# Allegro board hvps-1.brd
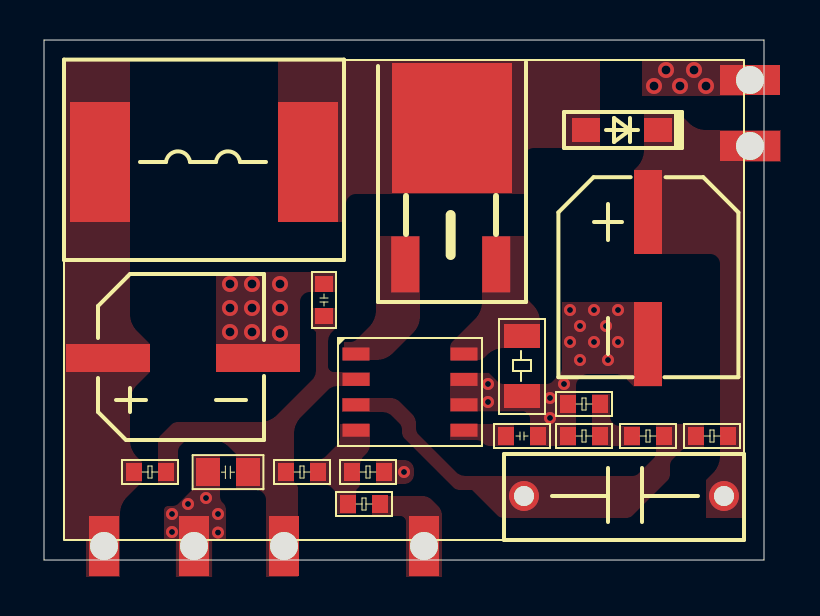
[diagram p0: board, top side]
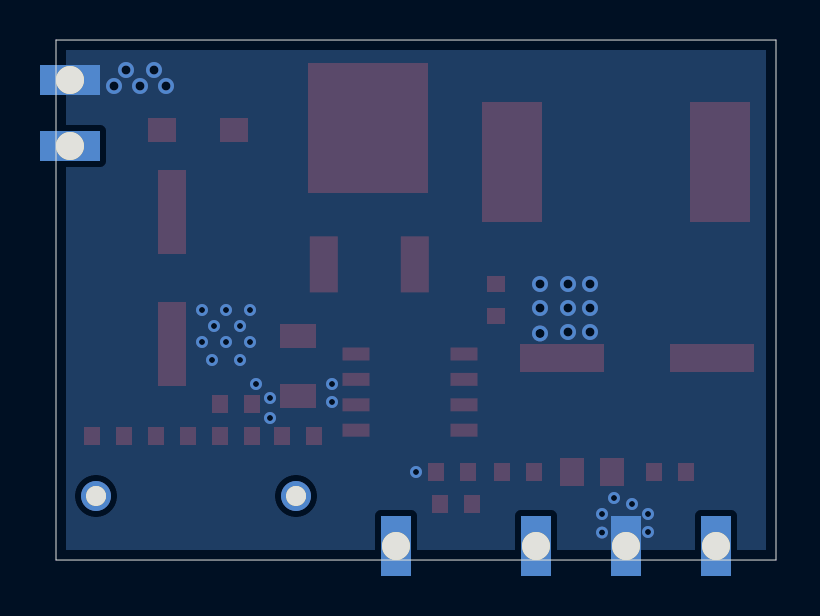
[diagram p1: board, bottom side, seen from below]

Outline 36 x 26 mm; copper layers: TOP, BOTTOM. Coordinates in mm from the lower left corner of the outline.
Outline path: 0,26 0,0 36,0 36,26 0,26

## Design rules (mm)
constraint set DEFAULT: min track width 0.254

## Placement (name value [footprint] x y rotation side)
C1  4.7uF/400V  [CAP-SMD-D8D0-L10D3-B8D3]  30.2 17.4 270 top
C2  0.1uF/35V  [C0603]  14 12.2 90 top
C3  220uF/35V  [CAP-SMD-D8D0-L8D3-W8D3-P7D5]  3.2 10.1 0 top
C4  10uF/35V  [C0805]  10.2 4.4 180 top
C5  0.1uF/35V  [C0603]  23.1 6.2 0 top
C6  0.1uF/400V  [CAP-THR-L11D4-W3D8-P10D0-D0D8]  34 3.2 180 top
D1  E1G  [SOD-123FL]  30.7 21.5 180 top
L1  100uH/2A  [IND-SMD-L11D5-W10D0-P10D4]  2.8 19.9 0 top
NOREF  -  []  25.05 9.57 90 top
NOREF#2  -  []  12 0.7 0 top
NOREF#3  -  []  18.06 14.78 0 top
NOREF#4  -  []  30.2 10.8 90 top
NOREF#5  -  []  23.9 8.2 90 top
NOREF#6  -  []  0 13 0 top
NOREF#7  -  []  8.3 6 90 top
NOREF#8  -  []  35.3 24 90 top
NOREF#9  -  []  28.5 15.7 0 top
NOREF#10  -  []  3.2 10.1 0 top
NOREF#11  -  []  35.3 20.7 90 top
NOREF#12  -  []  27.1 21.5 0 top
NOREF#13  -  []  23.9 7.3 90 top
NOREF#14  -  []  2.7 8.25 0 top
NOREF#15  -  []  33.6 12.9 90 top
NOREF#16  -  []  3 0.7 0 top
NOREF#17  -  []  18.06 14.78 0 top
NOREF#18  -  []  7.5 0.7 0 top
NOREF#19  -  []  18 0 90 top
Q1  AOD458  [TO-252-2-DPAK]  20.4 21.6 90 top
R1  50mR  [R1206]  23.9 11.2 270 top
R2  DNP  [R0603]  27.8 7.8 180 top
R3  10K  [R0603]  27.8 6.2 180 top
R4  0  [R0603]  31 6.2 180 top
R5  1.5M  [R0603]  34.2 6.2 180 top
R6  DNP  [R0603]  12.1 4.4 0 top
R7  0  [R0603]  17 4.4 180 top
R8  DNP  [R0603]  4.5 4.4 0 top
R9  DNP  [R0603]  16.8 2.8 180 top
TP1  T POINT F  [STAMP_HOLE_1D5X3D0_1D4]  35.3 24 270 top
TP2  T POINT F  [STAMP_HOLE_1D5X3D0_1D4]  35.3 20.7 270 top
TP3  T POINT F  [STAMP_HOLE_1D5X3D0_1D4]  3 0.7 180 top
TP4  T POINT F  [STAMP_HOLE_1D5X3D0_1D4]  7.5 0.7 180 top
TP5  T POINT F  [STAMP_HOLE_1D5X3D0_1D4]  12 0.7 180 top
TP6  T POINT F  [STAMP_HOLE_1D5X3D0_1D4]  19 0.7 180 top
U1  MAX1771ESA+  [SO-8]  21 10.3 270 top

## Library data of the parts
C1 C3 C6 = C
C2 C4 C5 = CAP NP
D1 = DIODE
L1 = INDUCTOR
Q1 = IRF644PbF
R1-R9 = R
TP1-TP6 = T POINT F
U1 = MAX1771ESA+

## Footprints (pads in the part's own frame, mm; a bottom-side part is the same pattern mirrored in y, then rotated)
C0603
  rect 0.8x0.9 smd: 1(0,0) 2(1.6,0)
C0805
  rect 1.2x1.4 smd: 1(0,0) 2(2,0)
CAP-SMD-D8D0-L8D3-W8D3-P7D5
  rect 4.2x1.4 smd: 1(0,0) 2(7.5,0)
CAP-SMD-D8D0-L10D3-B8D3
  rect 4.2x1.4 smd: 1(0,0) 2(6.6,0)
CAP-THR-L11D4-W3D8-P10D0-D0D8
  round 1.5 hole 1: 1(0,0) 2(10,0)
IND-SMD-L11D5-W10D0-P10D4
  rect 3x6 smd: 1(0,0) 2(10.4,0)
R0603
  rect 0.8x0.9 smd: 1(0,0) 2(1.6,0)
R1206
  rect 1.2x1.8 smd: 1(0,0) 2(3,0)
SO-8
  rect 0.65x1.35 smd: 1(0,-5.4) 2(1.27,-5.4) 3(2.54,-5.4) 4(3.81,-5.4) 5(3.81,0) 6(2.54,0) 7(1.27,0) 8(0,0)
SOD-123FL
  rect 1.4x1.2 smd: 1(0,0) 2(3.6,0)
STAMP_HOLE_1D5X3D0_1D4
  rect 1.5x3 hole 1.4: 1(0,0)
TO-252-2-DPAK
  rect 2.8x1.4 smd: 1(-6.82,2.34) 3(-6.82,-2.21)
  rect 6.5x6 smd: 2(0,0)

## Nets
GND: C1.2 C2.2 C3.2 C4.2 C5.2 R1.2 R2.2 R3.2 R7.1 TP1.1(TP) TP4.1(TP) U1.6 U1.7
EN: R9.1 TP6.1(TP)
PWR_IC: C2.1 C4.1 R6.1 R8.2 TP5.1(TP) U1.2(V+)
PWR_IN: C3.1 L1.1 R8.1 TP3.1(TP)
N00177: Q1.1 U1.1
N00181: Q1.3(S) R1.1 U1.8
N00224: D1.2 L1.2 Q1.2
N00671: C5.1 U1.5
N01266: C1.1 C6.1 D1.1(K) R5.1 TP2.1(TP)
N03183: R6.2 R7.2 R9.2 U1.4
N281531: C6.2 R4.1 R5.2 U1.3
N361468: R2.1 R3.1 R4.2

## Via types
v1: diameter 0.6, hole 0.3, TOP to BOTTOM, 22 vias
v2: diameter 0.8, hole 0.45, TOP to BOTTOM, 14 vias

## Routing (per net, layer and track width the routed paths; a pad name or vN(x,y) marks a point on that pad's centre or on a via; arc(x,y) is an arc through that point)
GND:
  vias: v1(6.4,2.3) v1(6.4,1.4) v1(7.2,2.8) v1(8.1,3.1) v1(8.7,2.3) v1(8.7,1.37) v1(18,4.4) v1(22.2,8.8) v1(22.2,7.9) v1(25.3,8.1) v1(25.3,7.1) v1(26,8.8) v1(26.3,12.5) v1(26.3,10.9) v1(26.8,11.7) v1(26.8,10) v1(27.5,12.5) v1(27.5,10.9) v1(28.1,11.7) v1(28.2,10) v1(28.7,12.5) v1(28.7,10.9) v2(9.3,13.8) v2(9.3,12.6) v2(9.3,11.4) v2(10.4,13.8) v2(10.4,12.6) v2(10.4,11.4) v2(11.8,13.8) v2(11.8,12.6) v2(11.8,11.33) v2(30.5,23.7) v2(31.1,24.5) v2(31.8,23.7) v2(32.5,24.5) v2(33.1,23.7)

## Copper pours and planes (outline as drawn; the poured copper is in the pictures)
GND on TOP: 8.6,14.4 14.6,14.4 14.6,13.4 13.3,13.4 12.95,13.25 12.8,12.9 12.8,9.4 8.6,9.4
GND on TOP: 7.5,5.2 8.8,5.2 8.8,3.2 8.84,3.02 8.94,2.86 8.96,2.84 9.06,2.68 9.1,2.5 9.1,1 8.41,1 8.41,-0.85 6.59,-0.85 6.59,1 6,1 6,2.5 6.06,2.64 6.2,2.7 6.4,2.7 6.58,2.74 6.74,2.84 7.36,3.46 7.46,3.62 7.5,3.8
GND on TOP: 35,23.2 35,25 29.9,25 29.9,23.2
GND on TOP: 25.9,12.9 30.9,12.9 30.9,8.68 29.48,8.68 29.07,9.09 28.83,9.24 28.56,9.3 27.2,9.3 27.02,9.26 26.86,9.16 26.74,9.04 26.64,8.88 26.6,8.7 26.6,5.7 24.3,5.7 24.3,7.08 24.28,7.17 24.23,7.25 24.11,7.36 24.03,7.42 23.94,7.43 20.3,7.43 20.3,9.36 22.25,9.36 22.66,8.94 22.82,8.84 23,8.8 25.1,8.8 25.28,8.84 25.44,8.94 25.76,9.26 25.86,9.42 25.9,9.6
GND on BOTTOM: 35.5,0.5 35.5,25.5 0.5,25.5 0.5,0.5
EN on TOP: 16.4,3.2 18.9,3.2 19.18,3.14 19.41,2.99 19.69,2.71 19.84,2.48 19.9,2.2 19.9,-0.85 18.1,-0.85 18.1,1.9 18.01,2.11 17.8,2.2 16.4,2.2
PWR_IC on TOP: 13.4,12.6 14.6,12.6 14.6,11.6 14.41,11.41 14.26,11.18 14.2,10.9 14.2,9.7 14.29,9.49 14.5,9.4 16.3,9.4 16.3,8.7 14.7,8.7 14.42,8.64 14.19,8.49 12.85,7.15 12.59,6.76 12.5,6.3 12.5,3.9 12.63,3.77 12.68,3.69 12.7,3.6 12.7,-0.85 11.1,-0.85 11.1,3 10.95,3.35 10.6,3.5 9.6,3.5 9.6,5.3 9.25,5.65 8.86,5.91 8.4,6 7.3,6 7.12,5.96 6.96,5.86 6.84,5.74 6.74,5.58 6.7,5.4 6.7,3.8 5.7,3.8 5.7,5.9 5.74,6.08 5.84,6.24 6.36,6.76 6.52,6.86 6.7,6.9 10.8,6.9 11.26,6.99 11.65,7.25 13.39,8.99 13.54,9.22 13.6,9.5 13.6,11.4 13.4,11.6
PWR_IN on TOP: 1,25 4.3,25 4.3,12.3 4.39,11.84 4.65,11.45 5.3,10.8 5.3,9.4 4.65,8.75 4.39,8.36 4.3,7.9 4.3,6 4.39,5.54 4.65,5.15 4.9,4.9 4.9,3.9 4.15,3.15 3.89,2.76 3.8,2.3 3.8,-0.85 2.1,-0.85 2.1,1 1,1
N00177 on TOP: 16.6,16.2 18.8,16.2 18.8,12.2 18.71,11.74 18.45,11.35 17.45,10.35 17.06,10.09 16.6,10 15,10 15,10.9 15.3,10.9 15.48,10.94 15.64,11.04 16.25,11.65 16.51,12.04 16.6,12.5
N00181 on TOP: 21.9,16.2 24,16.2 24,13.7 24.09,13.24 24.35,12.85 24.45,12.75 24.71,12.36 24.8,11.9 24.8,10.6 23,10.6 22.54,10.51 22.15,10.25 22.04,10.14 21.88,10.04 21.7,10 20.3,10 20.3,10.6 20.34,10.78 20.44,10.94 21.55,12.05 21.81,12.44 21.9,12.9
N00224 on TOP: 11.7,25 27.8,25 27.8,20.6 24.5,20.6 24.15,20.45 24,20.1 24,18.3 15.6,18.3 15.25,18.15 15.1,17.8 15.1,16.9 11.7,16.9
N00671 on TOP: 20.3,6.8 20.3,6 21.6,6 21.78,5.96 21.94,5.86 21.96,5.84 22.12,5.74 22.3,5.7 23.5,5.7 23.5,6.8
N01266 on TOP: 30,22.3 31.6,22.3 31.78,22.26 31.94,22.16 32.25,21.85 32.64,21.59 33.1,21.5 36.85,21.5 36.85,19.9 35,19.9 35,2.1 33.1,2.1 33.1,4 33.45,4.35 33.71,4.74 33.8,5.2 33.8,14.8 33.65,15.15 33.3,15.3 29.5,15.3 29.5,19.5 29.65,19.65 29.91,20.04 30,20.5
N03183 on TOP: 14.8,6.8 16.3,6.8 16.3,5.8 16.24,5.52 16.09,5.29 16.01,5.21 15.86,4.98 15.8,4.7 15.8,3.8 15.78,3.71 15.73,3.63 15.67,3.57 15.62,3.49 15.6,3.4 15.6,2.3 14.6,2.3 14.6,3.2 14.56,3.38 14.46,3.54 14.41,3.59 14.18,3.74 13.9,3.8 13.3,3.8 13.3,5 13.6,5 13.88,5.06 14.11,5.21 14.59,5.69 14.74,5.92 14.8,6.2
N281531 on TOP: 14.9,8.1 17.3,8.1 17.58,8.04 17.81,7.89 18.39,7.31 18.54,7.08 18.6,6.8 18.6,6.6 18.64,6.42 18.74,6.26 20.59,4.41 20.82,4.26 21.1,4.2 29.4,4.2 29.58,4.24 29.74,4.34 30.46,5.06 30.56,5.22 30.6,5.4 30.6,6.8 33,6.8 33,5.6 32.2,5.6 32.02,5.56 31.86,5.46 31.44,5.04 31.34,4.88 31.3,4.7 31.3,4.3 31.26,4.12 31.16,3.96 29.44,2.24 29.28,2.14 29.1,2.1 23,2.1 22.82,2.14 22.66,2.24 21.4,3.5 20.8,3.5 20.62,3.54 20.46,3.64 18.04,6.06 17.94,6.22 17.9,6.4 17.9,6.5 17.86,6.68 17.76,6.84 17.41,7.19 17.18,7.34 16.9,7.4 14.9,7.4
N361468 on TOP: 27.4,8.3 28.3,8.3 28.3,7.2 28.45,6.85 28.8,6.7 29.8,6.7 29.8,5.7 27.4,5.7
GND on TOP: 16.6,5 18,5 18.35,4.85 18.5,4.5 18.5,4.3 18.35,3.95 18,3.8 16.6,3.8
